# Altium PCB REED_wy_v1_0.PcbDoc
Units mil, origin at the board's own origin, x right, y up, seen from the top; angles counter-clockwise.
Board outline 944.88 x 866.14 mil, 2 copper layers (Top Layer, Bottom Layer); 9 components, 8 nets, 25 pads, 0 vias.
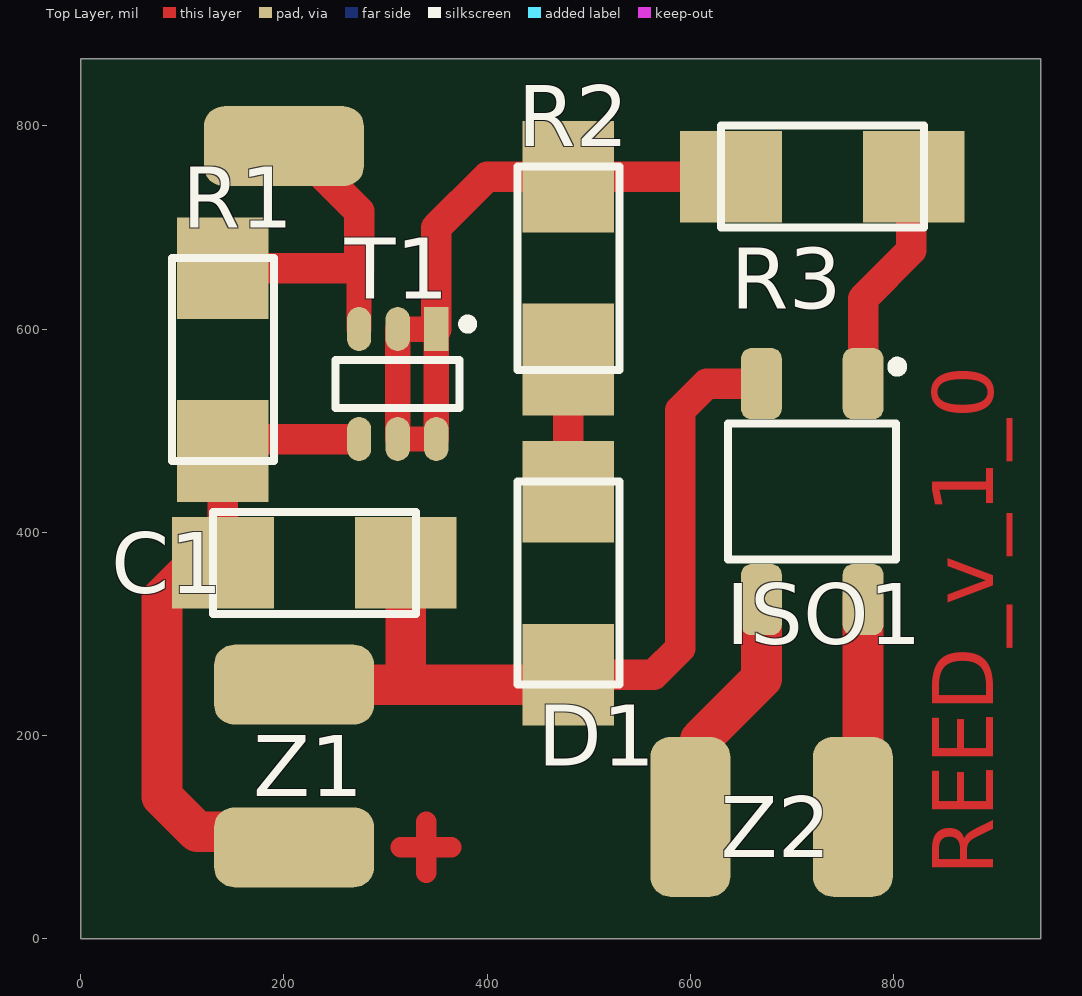
[diagram p0: Top Layer view]
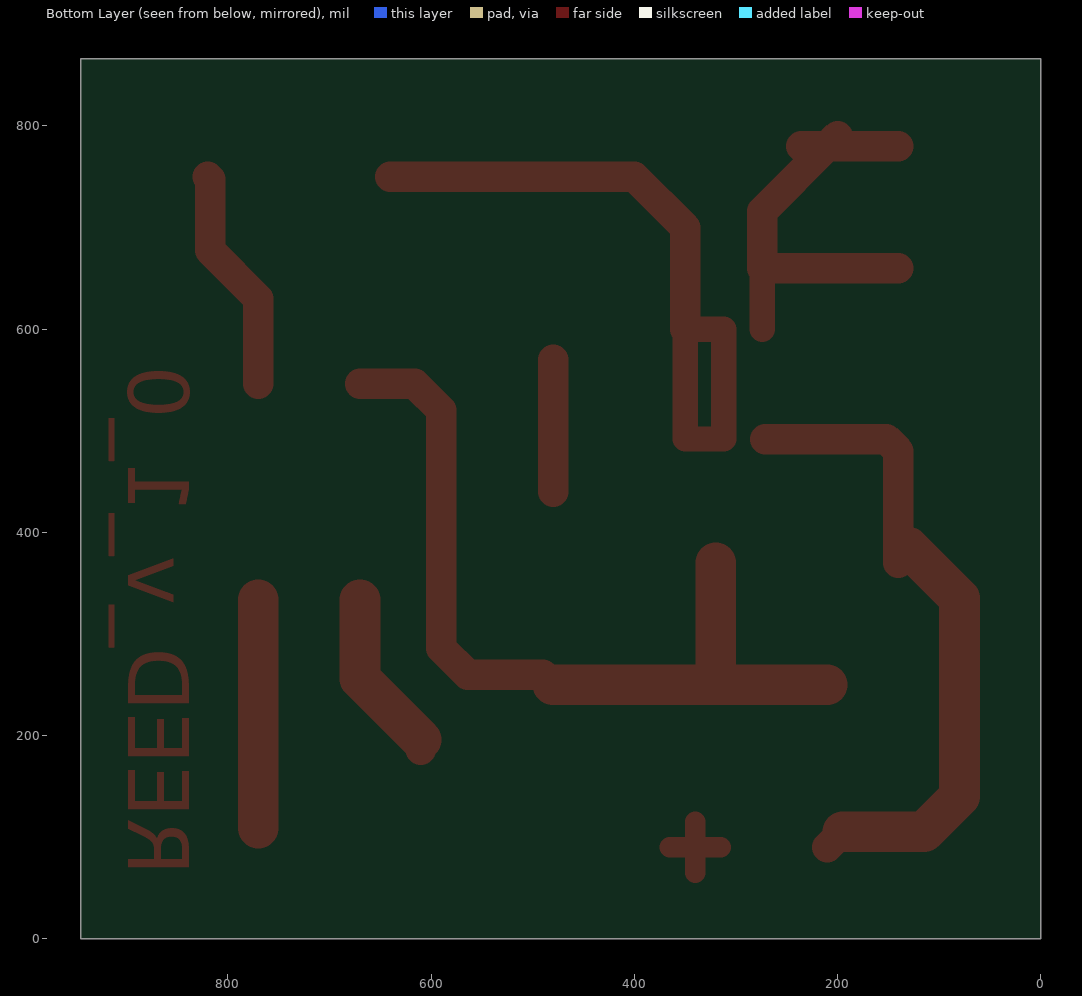
[diagram p1: Bottom Layer view, seen from below]
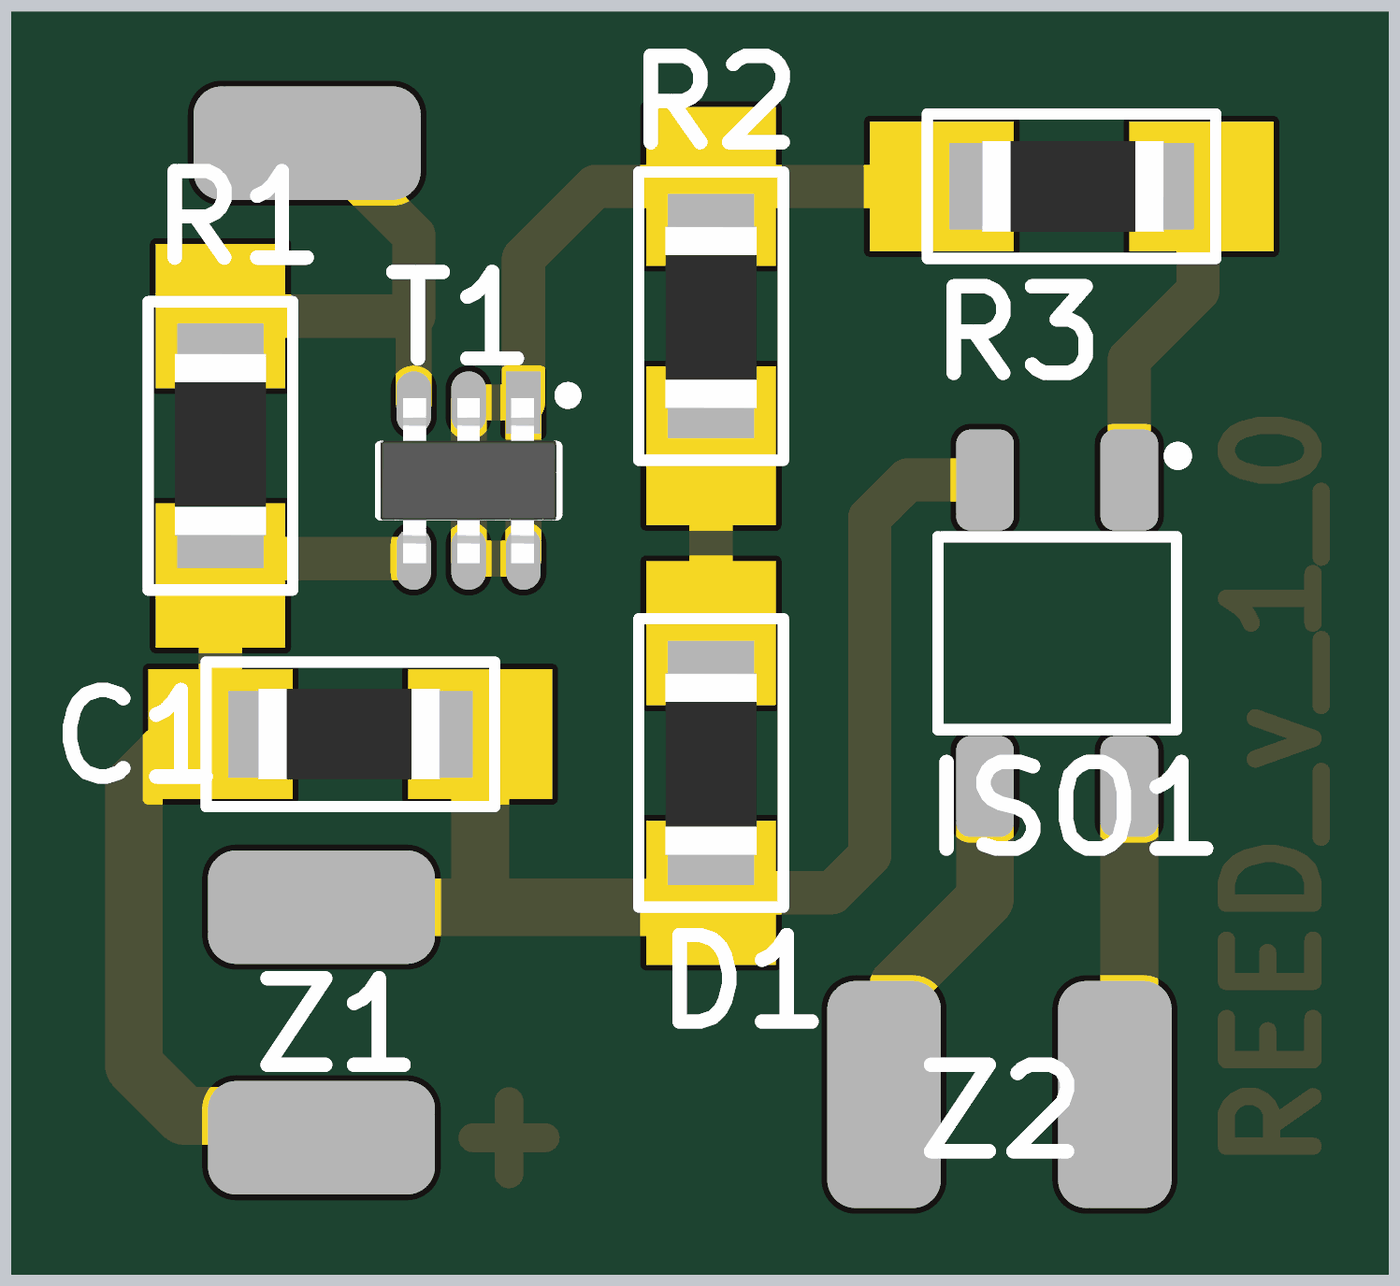
[diagram p2: 3D render of the assembled board from above, using the file's embedded part models]

## Layer stack, top to bottom
Top Solder: solder mask 0.4, Solder Resist, Dk 3.5
Top Layer: signal copper 1.4
Dielectric 1: dielectric 12.6, FR-4, Dk 4.8
Bottom Layer: signal copper 1.4
Bottom Solder: solder mask 0.4, Solder Resist, Dk 3.5

## Board outline
0,0 0,866.14 944.88,866.14 944.88,0

## Design rules (kind name [scope] priority, off if disabled: settings)
Clearance [All] p1: gap=10 ignorepadtopadclearanceinfootprint=FALSE except(0: Arc-Hole Track-Hole SMDPad-Hole THPad-Hole Via-Hole Fill-Hole Poly-Hole Region-Hole Text-Hole)
PolygonConnect [All] p1: connectstyle=Relief reliefconductorwidth=10 reliefentries=4 polygonreliefangle="90 Angle" airgapwidth=10
RoutingVias [All] p1: holewidth=28 width=50 viastyle="Through Hole" minholewidth=28 minwidth=50 maxholewidth=28 maxwidth=50
SolderMaskExpansion [All] p1: expansion=4 istentingtop=FALSE
Width [All] p1: maxlimit=50 minlimit=20 preferedwidth=25 minimp=50.000000 maximp=50.000000 favimp=50.000000
30 further rules are at their usual default settings.

## Classes and differential pairs
component class REED_wy_v1_0: C1 D1 ISO1 R2 T1 Z1 Z2

## Components (designator, comment, footprint, x,y, rotation, side; value= is the part's Value field where it differs from the comment)
C1 "10u/10V" R1206-mod#1 170,370 r0 top
D1 "LEDP2L-RW120" R1206-mod#1 480,290 r90 top
ISO1 "CPC1014N" SOP-4 720,440 r270 top
R1 "100k" R1206-mod#1 140,630 r270 top
R2 "330R" R1206-mod#2 480,600 r90 top
R3 "330R" R1206-mod#1 790,750 r180 top
T1 "SI3433CDV" TSOP6_3d 350,600 r270 top
Z1 "CON2" CAPC1005X05N 210,170 r90 top
Z2 "CON2" CAPC1005X05N 680,120 r180 top

## Footprints (in the part's own frame and the unit in brackets; to place one, negate y for a bottom-side part, rotate by r counter-clockwise, add the part's x,y. Pads: shape width x height; smd on the part's side, far side on the other; paste and mask are expansions set on the pad)
CAPC1005X05N [mm] "Chip Capacitor, 2-Leads, Body 1,00x0,50mm, IPC Medium Density"
  rrect50% 2x4 smd: 1(-2.032,0) 2(2.032,0)
  body extent -0.55,-0.3 0.55,0.3, height 0.5
R1206-mod#1 [mil] "Rezystor: thick film; SMD; 1206"
  rect 100x90 smd paste-3937.01: 1(-30,0) 2(150,0)
  silkscreen extent -40,-50 160,50, body extent -4,-31 122,32, height 24
R1206-mod#2 [mil] "Rezystor: thick film; SMD; 1206"
  rect 110x90 smd paste-3937.01: 1(-30,0) 2(150,0)
  silkscreen extent -40,-50 160,50, body extent -4,-31 122,32, height 24
SOP-4 [mil] "4-Pin SOP OptoMOS® Relay."
  rrect50% 70x40 smd: 1(-106.3,50) 2(-106.3,-50) 3(106.3,-50) 4(106.3,50)
  silkscreen extent -127,-83 67,88, body extent -121,-81 121,81, height 84
TSOP6_3d [mil]
  rect 43.31x24 smd: 1(0,0)
  oval 43.31x24 smd: 2(0,-38.03) 3(0,-76.06) 4(108.19,-76.06) 5(108.19,-38.03) 6(108.19,0)
  silkscreen extent -9,-99 78,35, body extent -3,-99 111,23, height 57

## Part data
C1: library part CP, "Kondensator elektrolityczny", Indeks="C 10U-3216-TAN-10V"
D1: library part LED, "LED", Autor="Matysiuk Dariusz", ComponentLink1Description=Datasheet, ComponentLink1URL=http://download.maritex.com.pl/pdfs/op/ledp2lrw.pdf, Indeks="D LEDP2L-RW120", Uwagi=czerwona
ISO1: "Solid State Relay; 1 Form A, 60V; 400mA.", Manufactuer=IXYS, Supplier Part Number 1=849-CPC1014N, ComponentLink1Description=Datasheet, ComponentLink1URL=http://www.ixysic.com/home/pdfs.nsf/www/CPC1014N.pdf/$file/CPC1014N.pdf, ComponentLink2Description="Product page", ComponentLink2URL=http://ixapps.ixys.com/PartDetails.aspx?pid=5862&r=0, Function="1 Form A", Indeks="IC SMD-CPC1014N", Marking code=1014N, MPN=CPC1014N, Supplier 1=Mouser, Supplier 2=Arrow, Supplier 3="Future Electronics", Supplier 4=TME, Supplier Part Number 2=CPC1014N, Supplier Part Number 3=CPC1014N-TUBE, Supplier Part Number 4=CPC1014N
R1 R2 R3: library part R, "Rezystor", Indeks="R 390R-0603"
T1: library part SI3441DV, "p-MOSFET", Indeks="IC SMD-SI3433CDV"

## Free pads (board coordinates)
  rrect50% 157.48x78.74 smd: 1(200,780)

## Nets (pads, with @x,y where several pads share a name; then routed paths per layer and width w, separated by ;. In a path a pad name is that pad's centre, name@x,y a point inside that pad or via, vN(x,y) a via of type N, cw(c..) or ccw(c..) an arc to the next point about the centre after c; other vN are vias at no path point)
3V3: C1.1 R1.2 T1.4 Z1.1 | length 662.3
  Top Layer w30: C1.1 R1.2 151.81,491.81 T1.4@270.94,491.81 ; Z1.1@194.89,105.11 Z1.1
  Top Layer w40: C1.1@130,385 80,335 80,140 114.89,105.11 Z1.1@194.89,105.11
GND: C1.2 D1.1 ISO1.2 Z1.2 | length 839.8
  Top Layer w30: D1.1@480,250 490,260 564,260 590,286 590,520 616.3,546.3 ISO1.2
  Top Layer w40: Z1.2 320,250 ; C1.2 320,250 ; D1.1@480,250 320,250
NetD1_2: D1.2 R2.1 | length 130
  Top Layer w30: D1.2 R2.1
NetISO1_1: ISO1.1 R3.1 | length 224.4
  Top Layer w30: ISO1.1 770,630 817.57,677.57 817.57,747.57 R3.1
NetISO1_3: ISO1.3 Z2.2 | length 172.7
  Top Layer w30: Z2.2@610,185.85 Z2.2@610,196
  Top Layer w40: Z2.2@610,196 670,256 ISO1.3
NetISO1_4: ISO1.4 Z2.1 | length 224.7
  Top Layer w40: Z2.1@770,109 ISO1.4
NetR2_2: R2.2 R3.2 T1.1 T1.2 T1.5 T1.6 | length 703.2
  Top Layer w25: T1.5 T1.2 T1.1 T1.6 T1.5
  Top Layer w30: T1.1 350,700 400,750 490,750 R3.2
REED_ON#: pad.1 R1.1 T1.3 | length 450
  Top Layer w25: T1.3 273.94,660
  Top Layer w30: R1.1 273.94,660 273.94,716.06 pad.1@210,780 ; pad.1@140,780 pad.1 pad.1@210,780 ; pad.1@200,790 pad.1@210,780 ; pad.1@235.48,780 pad.1@210,780
copper on no net: | length 100
  Top Layer w20: 315,90 365,90 ; 340,65 340,115

## Other copper
Top Layer:
  text "REED_v_1_0" at 898,62 h60 r90

## Silkscreen, mask and mechanical layers (free items; w line width, h text height)
Board Shape:
  the board outline again, w10